# Altium PCB st_linkv21_block1.PcbDoc
Units mil, origin at the board's own origin, x right, y up, seen from the top; angles counter-clockwise.
Board outline 988.77 x 1781.68 mil, 2 copper layers (Top Layer, Bottom Layer); 39 components, 32 nets, 157 pads, 32 vias.
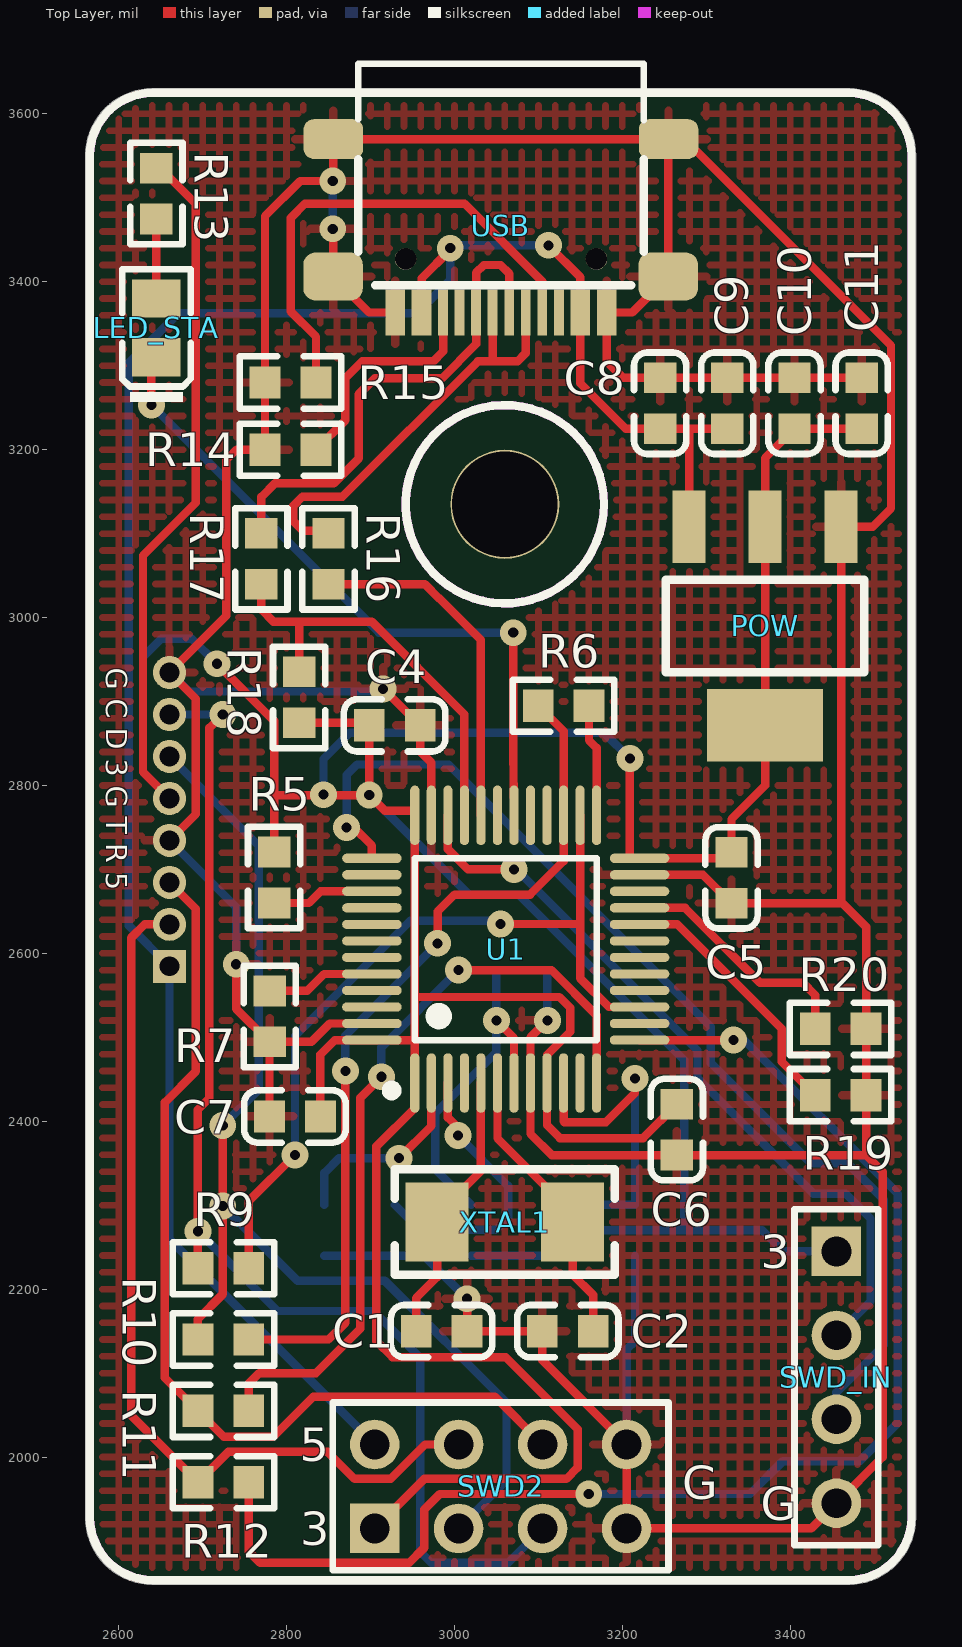
[diagram p0: Top Layer view]
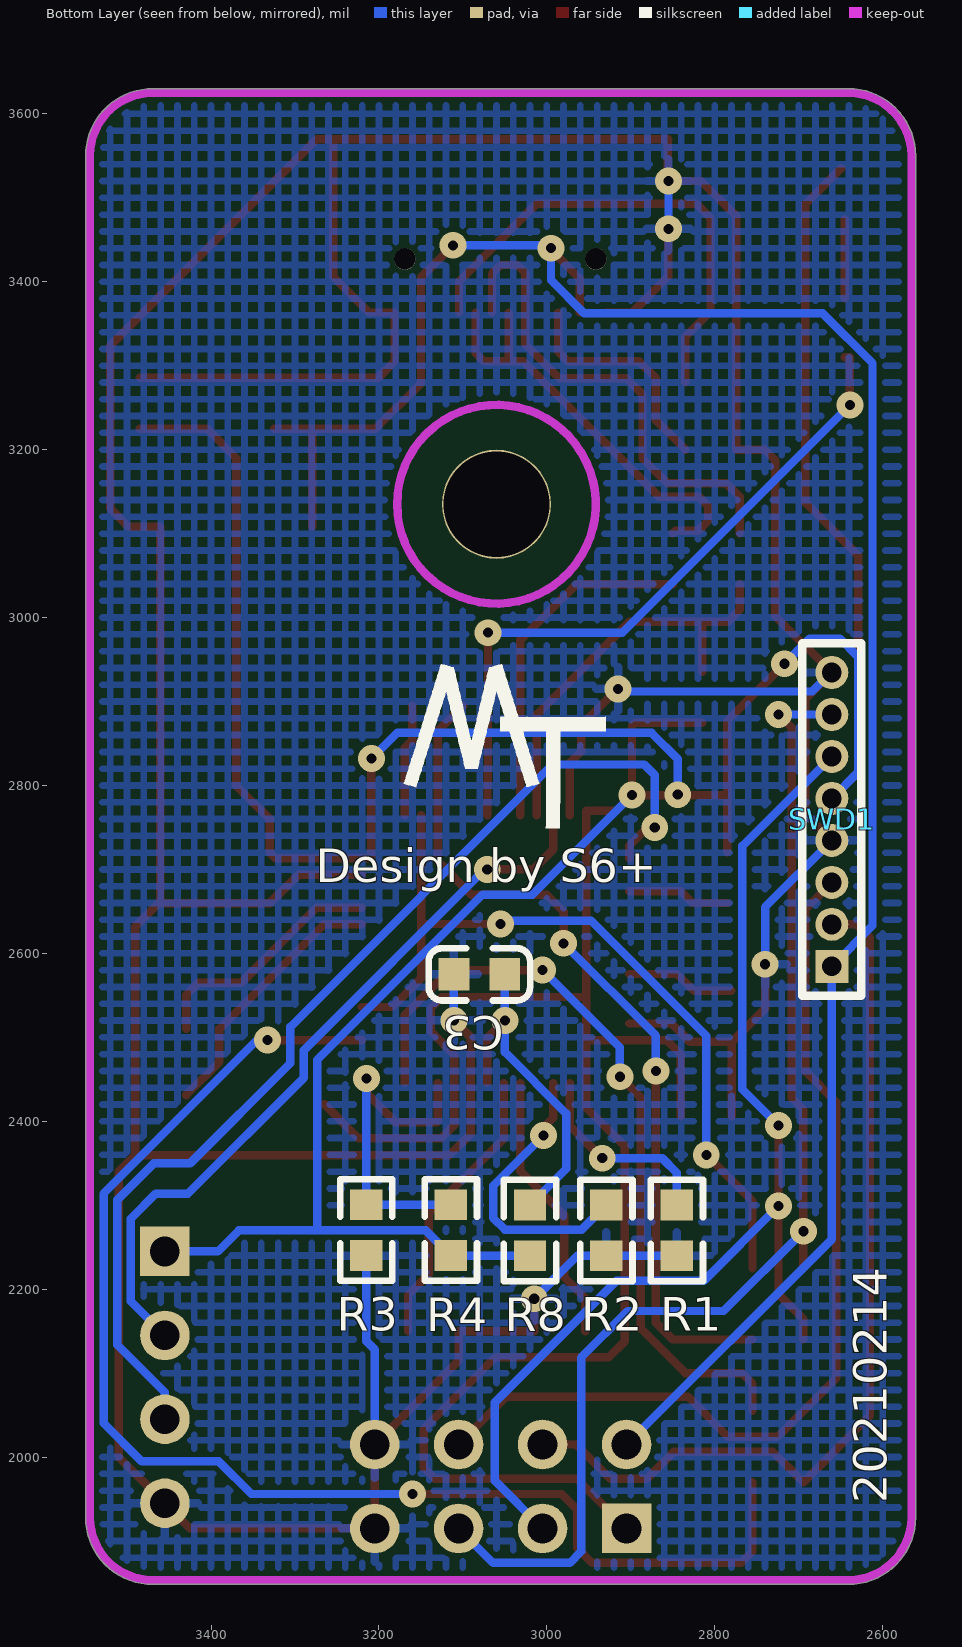
[diagram p1: Bottom Layer view, seen from below]
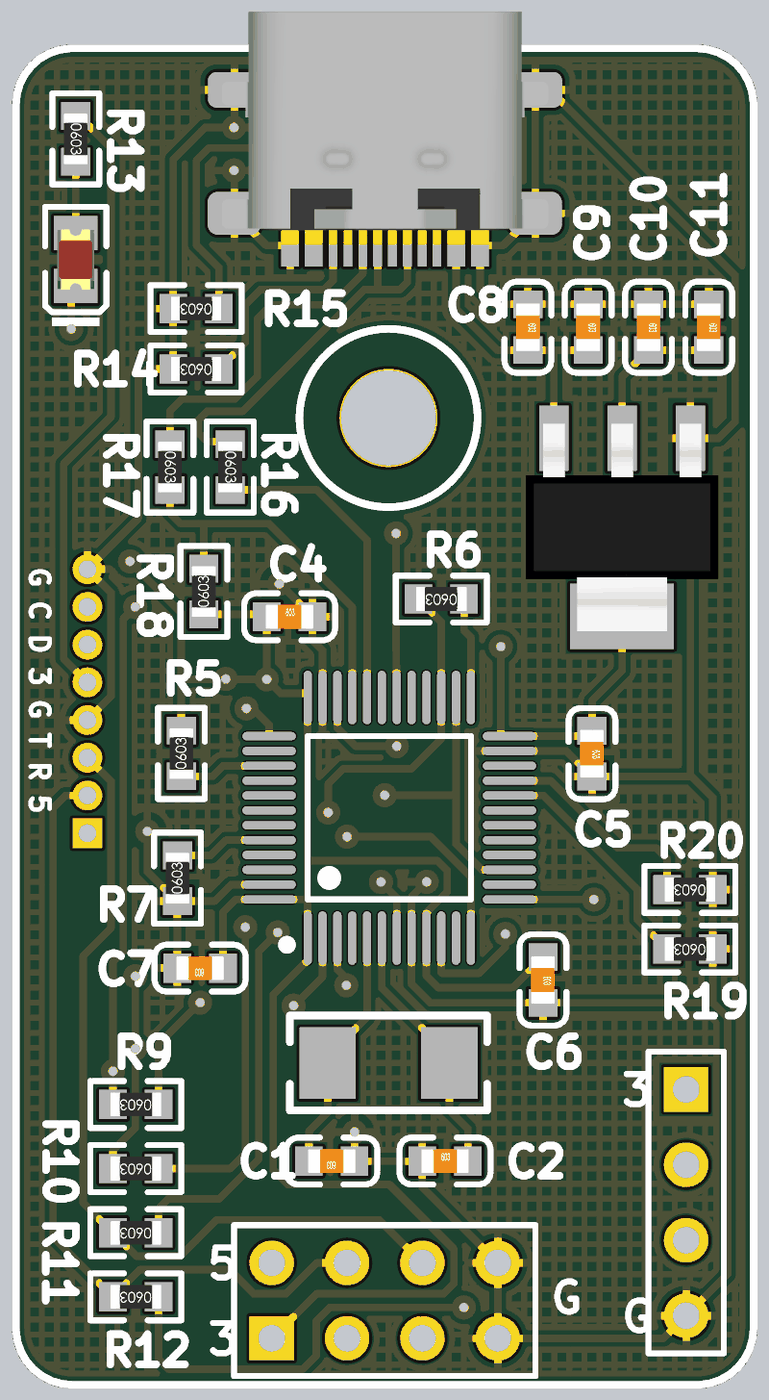
[diagram p2: 3D render of the assembled board from above, using the file's embedded part models]
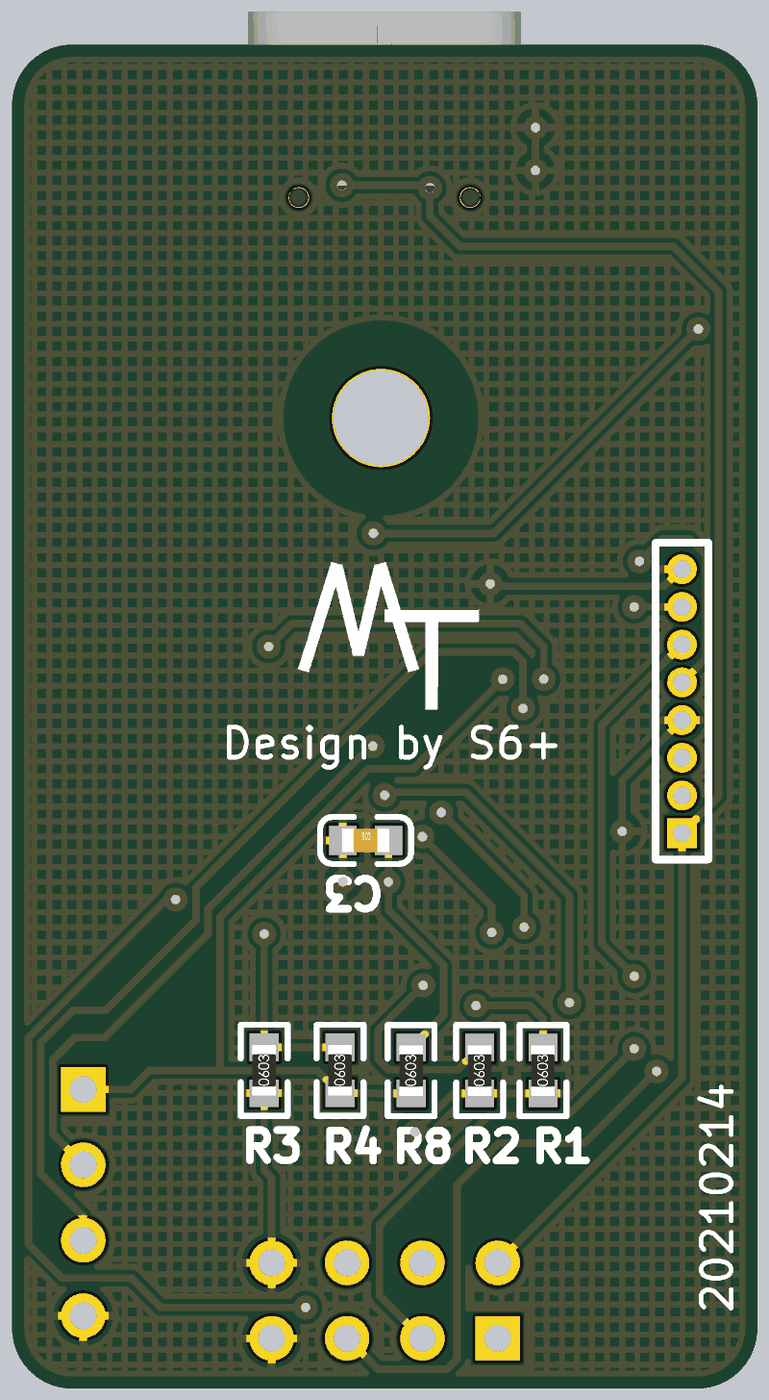
[diagram p3: 3D render of the assembled board from below, using the file's embedded part models]

## Layer stack, top to bottom
Top Solder: solder mask 0.4, Solder Resist, Dk 3.5
Top Layer: signal copper 1.4
Dielectric 1: dielectric 12.6, FR-4, Dk 4.8
Bottom Layer: signal copper 1.4
Bottom Solder: solder mask 0.4, Solder Resist, Dk 3.5

## Board outline
2560.61,1928.31 ccw(c2640.63,1928.35) 2640.6,1848.33 ccw(c2640.63,1853.35) 2640.63,1848.33 3469.37,1848.33 ccw(c3469.37,1928.35) 3549.39,1928.35 ccw(c3544.37,1928.35) 3549.32,1929.17 ccw(c3544.37,1930) 3549.39,1930 3549.39,3550 ccw(c3469.37,3550) 3469.37,3630.01 2640.63,3630.01 ccw(c2640.63,3550) 2560.61,3550 2560.61,1928.35 ccw(c2565.63,1928.35)

## Design rules (kind name [scope] priority, off if disabled: settings)
Clearance [All] p1: gap=6 ignorepadtopadclearanceinfootprint=FALSE
ComponentClearance [All] p1 off: gap=10 collisioncheckmode=3 verticalgap=10 showdistances=FALSE
HoleToHoleClearance [All] p1 off: gap=10 allowstackedmicrovias=TRUE
MinimumSolderMaskSliver [All] p1 off: minsoldermaskwidth=10
PolygonConnect [All] p1: connectstyle=Relief reliefconductorwidth=10 reliefentries=4 polygonreliefangle="90 Angle" airgapwidth=10
RoutingVias [All] p1: holewidth=12 width=32 viastyle="Through Hole" minholewidth=12 minwidth=32 maxholewidth=28 maxwidth=50
SilkToSilkClearance [All] p1 off: silktosilkclearance=10
SilkToSolderMaskClearance [IsPad] p1 off: minsilkscreentomaskgap=10 clearancetoexposedcopper=TRUE
SolderMaskExpansion [All] p1: expansion=4
Width [All] p1: maxlimit=10 minlimit=6 preferedwidth=10
25 further rules are at their usual default settings.

## Components (designator, comment, footprint, x,y, rotation, side; value= is the part's Value field where it differs from the comment)
C1 "10PF" 0603_C 2984.68,2150 r180 top
C2 "10PF" 0603_C 3135,2150 r0 top
C3 "104" 0603_C 3080.32,2575 r180 bottom
C4 "104" 0603_C 2928.78,2871.54 r0 top
C5 "104" 0603_C 3330,2690 r270 top
C6 "104" 0603_C 3265,2390 r270 top
C7 "104" 0603_C 2810,2405.75 r180 top
C8 "10UF" 0603_C 3245,3255.32 r270 top
C9 "104" 0603_C 3325,3255.32 r270 top
C10 "104" 0603_C 3405,3255.32 r270 top
C11 "10UF" 0603_C 3485,3255.32 r270 top
LED_STA "0805_LED" 0805_LED 2645,3345 r270 top
POW "AMS1117_3.3" SOT223 3370,2990 r90 top
R1 "10K" 0603_R 2845,2270 r90 bottom
R2 "10K" 0603_R 2929.09,2270 r90 bottom
R3 "10K" 0603_R 3215,2270.31 r90 bottom
R4 "10K" 0603_R 3114.25,2270.31 r90 bottom
R5 "0R" 0603_R 2785.12,2690.31 r90 top
R6 "100R" 0603_R 3130,2895 r180 top
R7 "100K" 0603_R 2780,2525 r90 top
R8 "100K" 0603_R 3020,2270 r90 bottom
R9 "22R" 0603_R 2724.69,2225 r180 top
R10 "22R" 0603_R 2724.69,2140 r180 top
R11 "22R" 0603_R 2724.69,2055 r180 top
R12 "22R" 0603_R 2724.69,1970 r180 top
R13 "680R" 0603_R 2645,3505 r270 top
R14 "5.1K" 0603_R 2804.69,3200 r180 top
R15 "5.1K" 0603_R 2804.69,3280 r180 top
R16 "22R" 0603_R 2850,3070 r270 top
R17 "22R" 0603_R 2770,3070 r270 top
R18 "1.5K" 0603_R 2815,2905 r90 top
R19 "100K" 0603_R 3460,2431.1 r180 top
R20 "100K" 0603_R 3460,2510 r180 top
SWD1 "Header_1.27_8P" HDR1.27_8P 2660.51,2584.57 r0 bottom locked
SWD2 "Header_2.54_4p_2" HDR2_4P 2905,1915 r90 top locked
SWD_IN "Header_2.54" HDR1_4P 3455,2245 r270 top locked
U1 "STM32F103C8T6" LQFP48 3065,2605 r90 top locked
USB "USB_C_16P_SMT" USB_C_16PIN_SMT 3055.39,3385.87 r180 top locked
XTAL1 "8Mhz" XTAL_5032_2 3060,2280 r180 top

## Footprints (in the part's own frame and the unit in brackets; to place one, negate y for a bottom-side part, rotate by r counter-clockwise, add the part's x,y. Pads: shape width x height; smd on the part's side, far side on the other; paste and mask are expansions set on the pad)
0603_C [mm]
  rect 0.93x0.98 smd: 1(-0.77,0) 2(0.77,0)
  silkscreen extent -1.53,-0.79 1.54,0.79, body extent -0.8,-0.4 0.8,0.4, height 0.3
0603_R [mm]
  rect 0.93x0.98 smd: 1(-0.77,0) 2(0.77,0)
  silkscreen extent -1.53,-0.79 1.54,0.79, body extent -0.85,-0.4 0.85,0.4, height 0.56
0805_LED [mm]
  rect 1.16x1.47 smd: A(-0.89,0) K(0.89,0)
  silkscreen extent -1.77,-1.03 2.25,1.03, body extent -1.01,-0.62 1.01,0.62, height 1.1
HDR1.27_8P [mm]
  rect 1x1 hole 0.6: 1(0,0)
  round 1 hole 0.6: 2(0,-1.27) 3(0,-2.54) 4(0,-3.81) 5(0,-5.08) 6(0,-6.35) 7(0,-7.62) 8(0,-8.89)
  silkscreen extent -0.89,-9.78 0.89,0.89
HDR1_4P [mm]
  rect 1.5x1.5 hole 0.9: 1(0,0)
  round 1.5 hole 0.9: 2(2.54,0) 3(5.08,0) 4(7.62,0)
  silkscreen extent -1.27,-1.27 8.89,1.27
HDR2_4P [mm]
  rect 1.5x1.5 hole 0.9: 1(0,0)
  round 1.5 hole 0.9: 2(0,-2.54) 3(0,-5.08) 4(0,-7.62) 5(2.54,-7.62) 6(2.54,-5.08) 7(2.54,-2.54) 8(2.54,0)
  silkscreen extent -1.27,-8.89 3.81,1.27
LQFP48 [mm]
  oval 1.8x0.28 smd mask+0.051: 1(-4.05,2.85) 2(-4.05,2.35) 3(-4.05,1.85) 4(-4.05,1.35) 5(-4.05,0.85) 6(-4.05,0.35) 7(-4.05,-0.15) 8(-4.05,-0.65) 9(-4.05,-1.15) 10(-4.05,-1.65) 11(-4.05,-2.15) 12(-4.05,-2.65) 25(4.05,-2.65) 26(4.05,-2.15) 27(4.05,-1.65) 28(4.05,-1.15) 29(4.05,-0.65) 30(4.05,-0.15) 31(4.05,0.35) 32(4.05,0.85) 33(4.05,1.35) 34(4.05,1.85) 35(4.05,2.35) 36(4.05,2.85)
  oval 0.28x1.8 smd mask+0.051: 13(-2.75,-3.95) 14(-2.25,-3.95) 15(-1.75,-3.95) 16(-1.25,-3.95) 17(-0.75,-3.95) 18(-0.25,-3.95) 19(0.25,-3.95) 20(0.75,-3.95) 21(1.25,-3.95) 22(1.75,-3.95) 23(2.25,-3.95) 24(2.75,-3.95) 37(2.75,4.15) 38(2.25,4.15) 39(1.75,4.15) 40(1.25,4.15) 41(0.75,4.15) 42(0.25,4.15) 43(-0.25,4.15) 44(-0.75,4.15) 45(-1.25,4.15) 46(-1.75,4.15) 47(-2.25,4.15) 48(-2.75,4.15)
  silkscreen extent -4.42,-2.65 2.75,3.7
SOT223 [mm]
  rect 2.2x1 smd: 1(3,-2.3) 2(3,0) 3(3,2.3)
  rect 2.2x3.5 smd: 2(-3,0)
  silkscreen extent -1.4,-3 1.4,3, body extent -3.49,-3.24 3.49,3.24, height 1.64
USB_C_16PIN_SMT [mm]
  rrect50% 1.8x1.2 smd: 0(-5.07,-4.677) 0(5.07,-4.677)
  rrect50% 1.8x1.45 smd: 0(-5.06,-0.519) 0(5.08,-0.519)
  rect 0.6x1.4 smd: 1(-3.2,0.57) 2(-2.4,0.57) 11(2.4,0.57) 12(3.2,0.57)
  rect 0.3x1.4 smd: 3(-1.75,0.57) 4(-1.25,0.57) 5(-0.75,0.57) 6(-0.25,0.57) 7(0.25,0.57) 8(0.75,0.57) 9(1.25,0.57) 10(1.75,0.57)
  round 0.65 hole 0.65: 13(-2.888,-1.049) 13(2.888,-1.049)
  silkscreen extent -4.32,-6.96 4.32,-0.25, body extent -5.5,-7.3 5.5,0.55, height 3.2
XTAL_5032_2 [mm]
  rect 1.9x2.4 smd: 1(-2.05,0) 2(2.05,0)
  silkscreen extent -3.33,-1.6 3.33,1.6

## Part data
C1 C2 C3 C4 C5 C6 C7 C8 C9 C10 C11: library part 0603_CAP
R1 R2 R3 R4 R5 R6 R7 R8 R9 R10 R11 R12 R13 R14 R15 R16 R17 R18 R19 R20: library part 0603_RES
SWD_IN: library part Header_2.54_4P
XTAL1: library part XTAL_8MHz_5032_2

## Free pads (board coordinates)
  round 129.92 hole 125.98: 0(3060,3135)

## Via types
v1: diameter 32, hole 12, Top Layer to Bottom Layer, tented both sides, 32 vias

## Nets (pads, with @x,y where several pads share a name; then routed paths per layer and width w, separated by ;. In a path a pad name is that pad's centre, name@x,y a point inside that pad or via, vN(x,y) a via of type N, cw(c..) or ccw(c..) an arc to the next point about the centre after c; other vN are vias at no path point)
3V3: C4.1 C5.1 C6.1 C7.1 C10.2 C11.2 POW.2 R4.1 R5.2 R8.1 R13.1 R18.1 SWD1.5 SWD2.1 SWD_IN.1 U1.1 U1.9 U1.24 U1.36 U1.48 | length 6117
  Top Layer w10: R13.1@2649.29,3535.31 2692,3492.61 2692,3137 2629,3074 2629,2816.08 SWD1.5 ; v1(2717,2945) 2785.12,2876.88 2785.12,2788.54 ; R5.2 2785.12,2788.54 ; R18.1 2895.32,2874.69 C4.1 v1(2898.46,2788.54) ; C7.1 2840.32,2479.57 2857.48,2496.73 U1.48 2952.8,2496.73 ; SWD2.1 2964,1974 3133.29,1974 3146.79,1987.5 3146.79,2033.21 3061,2119 2926,2119 2907,2138 2907,2370.2 2952.8,2416 U1.1 2952.8,2496.73 ; v1(3209,2832) 3209,2713.27 U1.24 3322.95,2713.27 C5.1 3330,2760 3370,2800 3370,2871.89 3370,3108.11 3370,3190 C10.2 C11.2 ; C6.1 3224.68,2380 3125.63,2380 3110.28,2395.35 U1.9 3110.28,2479.14 3138,2506.86 3138,2535 3125,2548 2952.8,2548 ; 2785.12,2788.54 v1(2898.46,2788.54) ; v1(2898.46,2788.54) 2917,2770 2952.8,2770 U1.36 2952.8,2548 ; 2952.8,2496.73 2952.8,2548
  Bottom Layer w10: SWD1.5 2629,2816.08 2629,2953 2651,2975 2687,2975 v1(2717,2945) ; v1(2844,2789) 2844,2831.5 2875.12,2862.62 3178.38,2862.62 v1(3209,2832) ; v1(2898.46,2788.54) 3017,2670 3076.5,2670 3273.5,2473 3273.5,2270 ; R8.1 3066,2239.69 3066.31,2240 R4.1 3144.25,2270 3273.5,2270 ; SWD_IN.1 3391.85,2245 3366.85,2270 3273.5,2270
5V: C8.2 C9.2 POW.3 SWD1.1 SWD2.8 USB.2 USB.11 | length 2575.3
  Top Layer w10: USB.11 2960.91,3404.09 2995,3438.18 v1(2995,3440) ; v1(3111.81,3443.43) 3149.88,3405.36 USB.2 3149.88,3278.98 3203.86,3225 C8.2 3280,3225 ; POW.3 3279.45,3224.45 3280,3225 ; C9.2 3280,3225
  Bottom Layer w10: SWD2.8 2660.51,2259.49 SWD1.1 2612,2633.08 2612,3303 2671.5,3362.5 2955.5,3362.5 2995,3402 v1(2995,3440) 2995.24,3439.76 2998.9,3443.43 v1(3111.81,3443.43)
GND: C1.1 C2.1 C3.1 C4.2 C5.2 C6.2 C7.2 C8.1 C9.1 C10.1 C11.1 POW.1 R1.1 R2.1 R3.1 R7.1 R14.2 R15.2 R19.1 R20.1 SWD1.4 SWD1.8 SWD2.4 SWD2.5 SWD_IN.4 U1.8 U1.23 U1.35 U1.47 USB.0 USB.1 USB.12 | length 7013.7
  Top Layer w10: SWD1.4 2692,2766.06 2692,2903.08 SWD1.8 2728,3002.06 2728,3187.5 2740.5,3200 R14.2 R15.2 2774.37,3478.11 2816.26,3520 v1(2855,3520) 2855.79,3520.79 USB.0@2855.79,3570 ; v1(2740,2587) 2740,2534.06 2779.69,2494.37 C7.2 ; R7.1 2829.69,2494.69 2851.42,2516.42 U1.47 ; v1(2855,3463.11) 2855.39,3462.72 2855.39,3406.3 2898.27,3363.43 USB.12 ; USB.0@2855,3570 USB.0@2855.79,3570 ; v1(2915,2915) 2915.63,2915 C4.2 ; C4.2@2959.09,2865 C4.2 ; U1.35 2972.48,2827.09 2959.09,2840.47 C4.2 ; v1(3015,2188.57) C1.1 C2.1 3104.69,2115.31 SWD2.5 SWD2.4 3425,1915 SWD_IN.4 3510,2000 3510,2340 3490.31,2359.69 C6.2 3115.9,2359.69 3090.59,2385 U1.8 ; 3090.59,2392.41 U1.8 ; v1(3110.63,2520.12) 3090.59,2500.08 U1.8 ; U1.23 3296.1,2693.58 C5.2 3462.33,2659.69 3490.31,2631.7 R20.1 R19.1 3490.31,2360 ; 3460.55,2661.46 POW.1 3498.11,3108.11 3520,3130 3520,3324.09 3274.09,3570 3255,3570 USB.0@3254.21,3570 ; C11.1 C10.1 C9.1 C8.1 3200.75,3285.63 3181.38,3305 USB.1 3211.73,3363.43 3254.61,3406.3 3254.61,3569.61 USB.0@3254.21,3570 ; USB.0@2855.79,3570 USB.0@3254.21,3570
  Bottom Layer w10: SWD1.4 2740,2655.08 v1(2740,2587) ; SWD1.8 2661.38,2934.57 2683.94,2912 2912,2912 v1(2915,2915) ; R1.1 R2.1 2963.89,2239.69 v1(3015,2188.57) ; v1(2855,3463.11) v1(2855,3520) v1@2855,3525 ; v1(3110.63,2520.12) C3.1 ; SWD2.5 3205,2128 3215,2138 R3.1
MCU_SCK: SWD_IN.3 U1.37 | length 1287
  Top Layer w10: v1(2871.46,2750) 2880,2750 2901.61,2728.39 U1.37
  Bottom Layer w10: v1(2871.46,2750) 2871.46,2812.5 2883.96,2825 2993,2825 3305.5,2512.5 3305.5,2469.25 3424.75,2350 3468,2350 3511.53,2306.47 3511.53,2133.53 3455,2077 SWD_IN.3
MCU_SWD: SWD_IN.2 U1.34 | length 901.1
  Top Layer w10: U1.34 2992.17,2724.01 3016.18,2700 v1(3070.91,2700)
  Bottom Layer w10: v1(3070.91,2700) 3074,2700 3289.5,2484.5 3289.5,2451.62 3427.39,2313.73 3465.8,2313.73 3495.53,2284 3495.53,2185.53 SWD_IN.2
NetC1_2: C1.2 U1.5 XTAL1.2 | length 327.5
  Top Layer w10: C1.2 2954.37,2189.37 2979.29,2214.29 XTAL1.2 2979.29,2288.43 3031.54,2340.67 U1.5
NetC2_2: C2.2 U1.6 XTAL1.1 | length 342.8
  Top Layer w10: U1.6 3051.22,2379.69 3140.71,2290.2 XTAL1.1 3140.71,2217.72 3165.32,2193.11 C2.2
NetC3_2: C3.2 R8.2 U1.7 | length 405.8
  Top Layer w10: v1(3050,2520) 3070.91,2499.09 U1.7
  Bottom Layer w10: R8.2 2977,2343.32 2977,2409.41 3050,2482.41 v1(3050,2520) C3.2
NetLED_STA_A: LED_STA.A R13.2 | length 94.6
  Top Layer w10: LED_STA.A R13.2
NetR1_2: R1.2 U1.2 | length 239.9
  Top Layer w10: v1(2934,2356) 2972.48,2394.48 U1.2
  Bottom Layer w10: R1.2 2845,2338.5 2862.5,2356 v1(2934,2356)
NetR2_2: R2.2 U1.3 | length 343.2
  Top Layer w10: U1.3 2992.17,2404.25 3004,2392.41 v1(3004,2383)
  Bottom Layer w10: R2.2 2958.41,2271 3050,2271 3064,2285 3064,2323 v1(3004,2383)
NetR3_2: R3.2 R4.2 U1.10 | length 413.9
  Top Layer w10: U1.10 3129.96,2400 3130.96,2399 3180.5,2399 3215,2433.5 v1(3215,2451)
  Bottom Layer w10: R4.2 R3.2 v1(3215,2451)
NetR5_1: R5.1 U1.39 | length 122.3
  Top Layer w10: R5.1 2826.49,2660 2840.39,2673.9 U1.39
NetR7_2: R7.2 U1.44 | length 130
  Top Layer w10: R7.2 2824.53,2555.32 2844.68,2575.47 U1.44
NetR14_1: R14.1 USB.10 | length 275.8
  Top Layer w10: R14.1 2870,3235 2870,3285.24 2890,3305.24 2974.68,3305.24 2986.5,3317.05 USB.10
NetR15_1: R15.1 USB.4 | length 590.4
  Top Layer w10: R15.1 2835,3334.68 2805,3364.68 2805,3476 2822,3493 3012,3493 3104.61,3400.39 USB.4
NetR16_1: R16.1 USB.5 USB.7 | length 525
  Top Layer w10: R16.1 2846.85,3103.46 2819.65,3103.46 2807.97,3115.14 2807.97,3132.97 2819,3144 2866.63,3144 3027.86,3305.24 3045.55,3305.24 ; USB.7 3045.55,3305.24 ; USB.5 3084.92,3315 3075.16,3305.24 3045.55,3305.24
NetR17_1: R17.1 USB.6 USB.8 | length 598.2
  Top Layer w10: R17.1 2770,3143.78 2786.22,3160 2856.38,3160 2886,3189.62 2886,3266 2905,3285 2985,3285 3025.87,3325.87 USB.8 3025.87,3410.87 3035,3420 3055,3420 3065.24,3409.76 USB.6
NetR19_2: R19.2 U1.20 | length 316.4
  Top Layer w10: U1.20 3265.47,2634.53 3390,2510 3390,2470.79 R19.2
NetR20_2: R20.2 U1.21 | length 292.5
  Top Layer w10: U1.21 3274.79,2654.21 3364,2565 3415,2565 3429.68,2550.32 R20.2
RX: R12.2 SWD1.2 SWD2.7 | length 1089.5
  Top Layer w10: SWD1.2 2631,2634.57 2615,2618.57 2615,2049.37 R12.2 2730.54,2006.17 2848.83,2006.17 2881,1974 2924,1974 2965,2015 SWD2.7
STA_LED: LED_STA.K U1.30 | length 823.8
  Top Layer w10: v1(2639,3253) 2639,3309.96 LED_STA.K ; v1(3070,2982) 3070,2842.91 U1.30
  Bottom Layer w10: v1(2639,3253) 2910,2982 v1(3070,2982)
SWCLK: R9.2 SWD1.7 SWD2.3 | length 1461.9
  Top Layer w10: R9.2 v1(2694.37,2269) 2694.37,2413.94 2708,2427.57 2708,2868.57 v1(2724,2884.57)
  Bottom Layer w10: SWD1.7 v1(2724,2884.57) ; v1(2694.37,2269) 2789.39,2173.98 2903.55,2173.98 2959.03,2118.5 2959.03,1887.5 2972.53,1874 3064,1874 SWD2.3
SWDIO: R10.2 SWD1.6 SWD2.2 | length 1377.3
  Top Layer w10: R10.2 2694.37,2164.37 2724,2194 v1(2724,2299) v1(2724,2395)
  Bottom Layer w10: SWD1.6 2767,2728.08 2767,2438 v1(2724,2395) ; v1(2724,2299) 2813,2210 2917,2210 3062,2065 3062,1972 SWD2.2
T_JTCK: R9.1 U1.15 U1.26 | length 976.8
  Top Layer w10: R9.1 2755,2305 v1(2810,2360) ; v1(3055,2635) 3149.65,2635 ; U1.26 3149.65,2635 ; U1.15 3183.9,2536.1 3149.65,2570.35 3149.65,2635
  Bottom Layer w10: v1(2810,2360) 2810,2501.61 2947.39,2639 3051,2639 v1(3055,2635)
T_JTMS: R6.2 R10.1 U1.27 | length 1031.2
  Top Layer w10: R10.1 2850,2140 2870,2160 v1(2870,2460) ; v1(2980,2612) 2980,2649.83 3000.17,2670 3090.12,2670 3129.96,2709.84 U1.27 3129.96,2864.72 R6.2
  Bottom Layer w10: v1(2870,2460) 2870,2502 v1(2980,2612)
T_RX: R12.1 U1.13 | length 1613.3
  Top Layer w10: R12.1 2755,1887.5 2768.5,1874 2946,1874 2964,1892 2964,1937.5 2982.5,1956 v1(3160,1956) ; U1.13 v1(3332.5,2496.73)
  Bottom Layer w10: v1(3160,1956) 3352,1956 3391,1995 3482.64,1995 3528,2040.36 3528,2313.73 3345,2496.73 v1(3332.5,2496.73)
T_SWDIO_IN: R6.1 U1.25 | length 134.3
  Top Layer w10: R6.1 3160.31,2853.78 3169.33,2844.76 U1.25
T_TX: R11.1 U1.12 | length 935.4
  Top Layer w10: R11.1 2755,2087.5 2767.5,2100 2835,2100 2888,2153 2888,2428 v1(2913,2453) ; v1(3005,2580) 3115.63,2580 3169.33,2526.3 U1.12
  Bottom Layer w10: v1(2913,2453) 2913,2488 v1(3005,2580)
TX: R11.2 SWD1.3 SWD2.6 | length 1141.2
  Top Layer w10: SWD1.3 2692,2653.08 2692,2459.57 2655,2422.57 2655,2094.37 R11.2 2725.37,2024 2784,2024 2832,2072 3048,2072 SWD2.6
USB_N: R16.2 U1.32 | length 418
  Top Layer w10: R16.2 2964.74,3039.68 2981.47,3022.95 2982.05,3022.95 3031.54,2973.46 U1.32
USB_P: R17.2 R18.2 U1.33 | length 503.8
  Top Layer w10: R17.2 2770,3009.37 2784.37,2995 2815,2995 ; R18.2 2815,2995 ; U1.33 3011.85,2884.72 2901.57,2995 2815,2995
pads on no net: U1.4 U1.11 U1.14 U1.16 U1.17 U1.18 U1.19 U1.22 U1.28 U1.29 U1.31 U1.38 U1.40 U1.41 U1.42 U1.43 U1.45 U1.46 USB.3 USB.9 USB.13

## Polygon pours and split planes (outlines as drawn)
GND on Top Layer "Top Layer-No Net" (hatched 90Degree grid 20 track 8, remove dead copper, pour order 0): 2560.61,1928.31 ccw(c2640.63,1928.35) 2640.6,1848.33 ccw(c2640.63,1853.34) 2640.63,1848.33 3469.37,1848.33 ccw(c3469.37,1928.35) 3549.39,1928.35 ccw(c3544.37,1928.35) 3549.32,1929.17 ccw(c3544.37,1930) 3549.39,1930 3549.39,3550 ccw(c3469.37,3550) 3469.37,3630.01 2640.63,3630.01 ccw(c2640.63,3550) 2560.61,3550 2560.61,1928.35 ccw(c2565.63,1928.35)
GND on Bottom Layer "Top Layer-No Net1" (hatched 90Degree grid 20 track 8, remove dead copper, pour order 1): 2560.61,1928.31 ccw(c2640.63,1928.35) 2640.6,1848.33 ccw(c2640.63,1853.34) 2640.63,1848.33 3469.37,1848.33 ccw(c3469.37,1928.35) 3549.39,1928.35 ccw(c3544.37,1928.35) 3549.32,1929.17 ccw(c3544.37,1930) 3549.39,1930 3549.39,3550 ccw(c3469.37,3550) 3469.37,3630.01 2640.63,3630.01 ccw(c2640.63,3550) 2560.61,3550 2560.61,1928.35 ccw(c2565.63,1928.35)

## Keep-outs
Top Layer:
  circle w10: c3060,3135 r118.11
  lines w10: 2565.63,1928.35 ccw(c2640.63,1928.35) 2640.63,1853.35 3469.37,1853.35 ccw(c3469.37,1928.35) 3544.37,1928.35 3544.37,3550 ccw(c3469.37,3550) 3469.37,3625 2640.63,3625 ccw(c2640.63,3550) 2565.63,3550 2565.63,1928.35
Bottom Layer:
  circle w10: c3060,3135 r118.35
  lines w10: 2565.63,1928.35 ccw(c2640.63,1928.35) 2640.63,1853.35 3469.37,1853.35 ccw(c3469.37,1928.35) 3544.37,1928.35 3544.37,3550 ccw(c3469.37,3550) 3469.37,3625 2640.63,3625 ccw(c2640.63,3550) 2565.63,3550 2565.63,1928.35

## Silkscreen, mask and mechanical layers (free items; w line width, h text height)
Top Overlay:
  circle w10: c3060,3135 r118.11
  lines w10: 3544.37,1928.35 cw(c3469.37,1928.35) 3469.37,1853.35 2640.63,1853.35 cw(c2640.63,1928.35) 2565.63,1928.35 2565.63,3550 cw(c2640.63,3550) 2640.63,3625 3469.37,3625 cw(c3469.37,3550) 3544.37,3550 3544.37,1930
  text "G C D 3 G T R 5" at 2585,2940.32 h25 r270
  text "3" at 3365,2225 h40
  text "5" at 2815.47,1995 h40
  text "G" at 3271.22,1950 h40
  text "G" at 3365,1925 h40
  text "3" at 2816.22,1895 h40
Bottom Overlay:
  drawing of 1127 lines, arcs and shapes, not listed
  text "Design by S6+" at 3275,2685 h40
  text "20210214" at 2595,1945 h40 r270
Mechanical 1:
  lines w10: 2565.63,1928.35 ccw(c2640.63,1928.35) 2640.63,1853.35 3469.37,1853.35 ccw(c3469.37,1928.35) 3544.37,1928.35 3544.37,3550 ccw(c3469.37,3550) 3469.37,3625 2640.63,3625 ccw(c2640.63,3550) 2565.63,3550 2565.63,1928.35